# Altium PCB PCB1.PcbDoc
Units mm, origin at the board's own origin, x right, y up, seen from the top; angles counter-clockwise.
Board outline 71.98 x 71.98 mm, 2 copper layers (Top Layer, Bottom Layer); 36 components, 29 nets, 110 pads, 28 vias.
Unrouted connection lines stored in the file: 7.
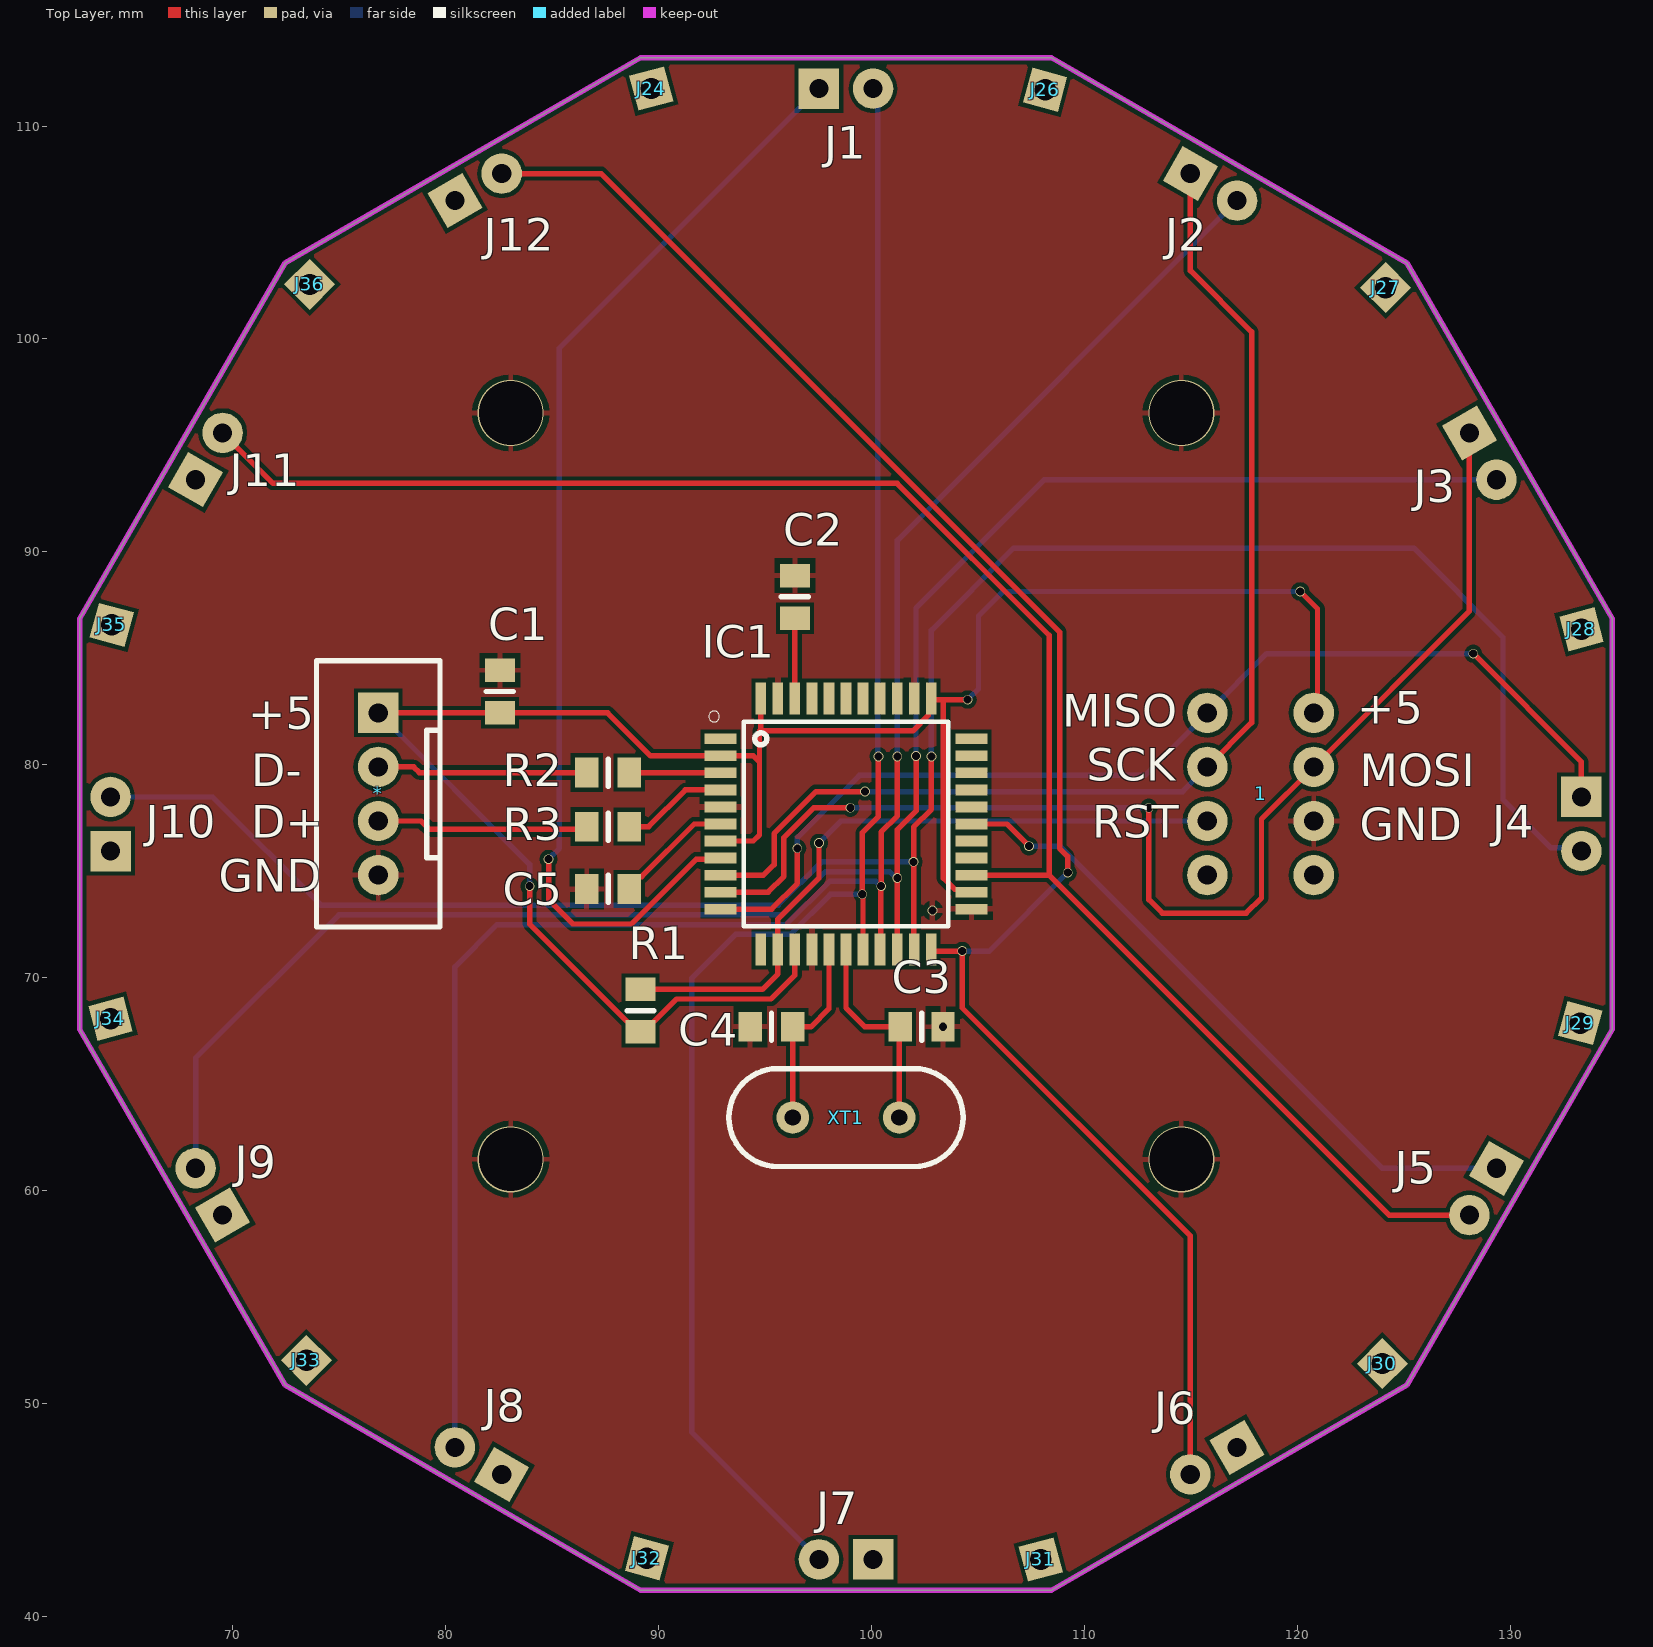
[diagram p0: Top Layer view]
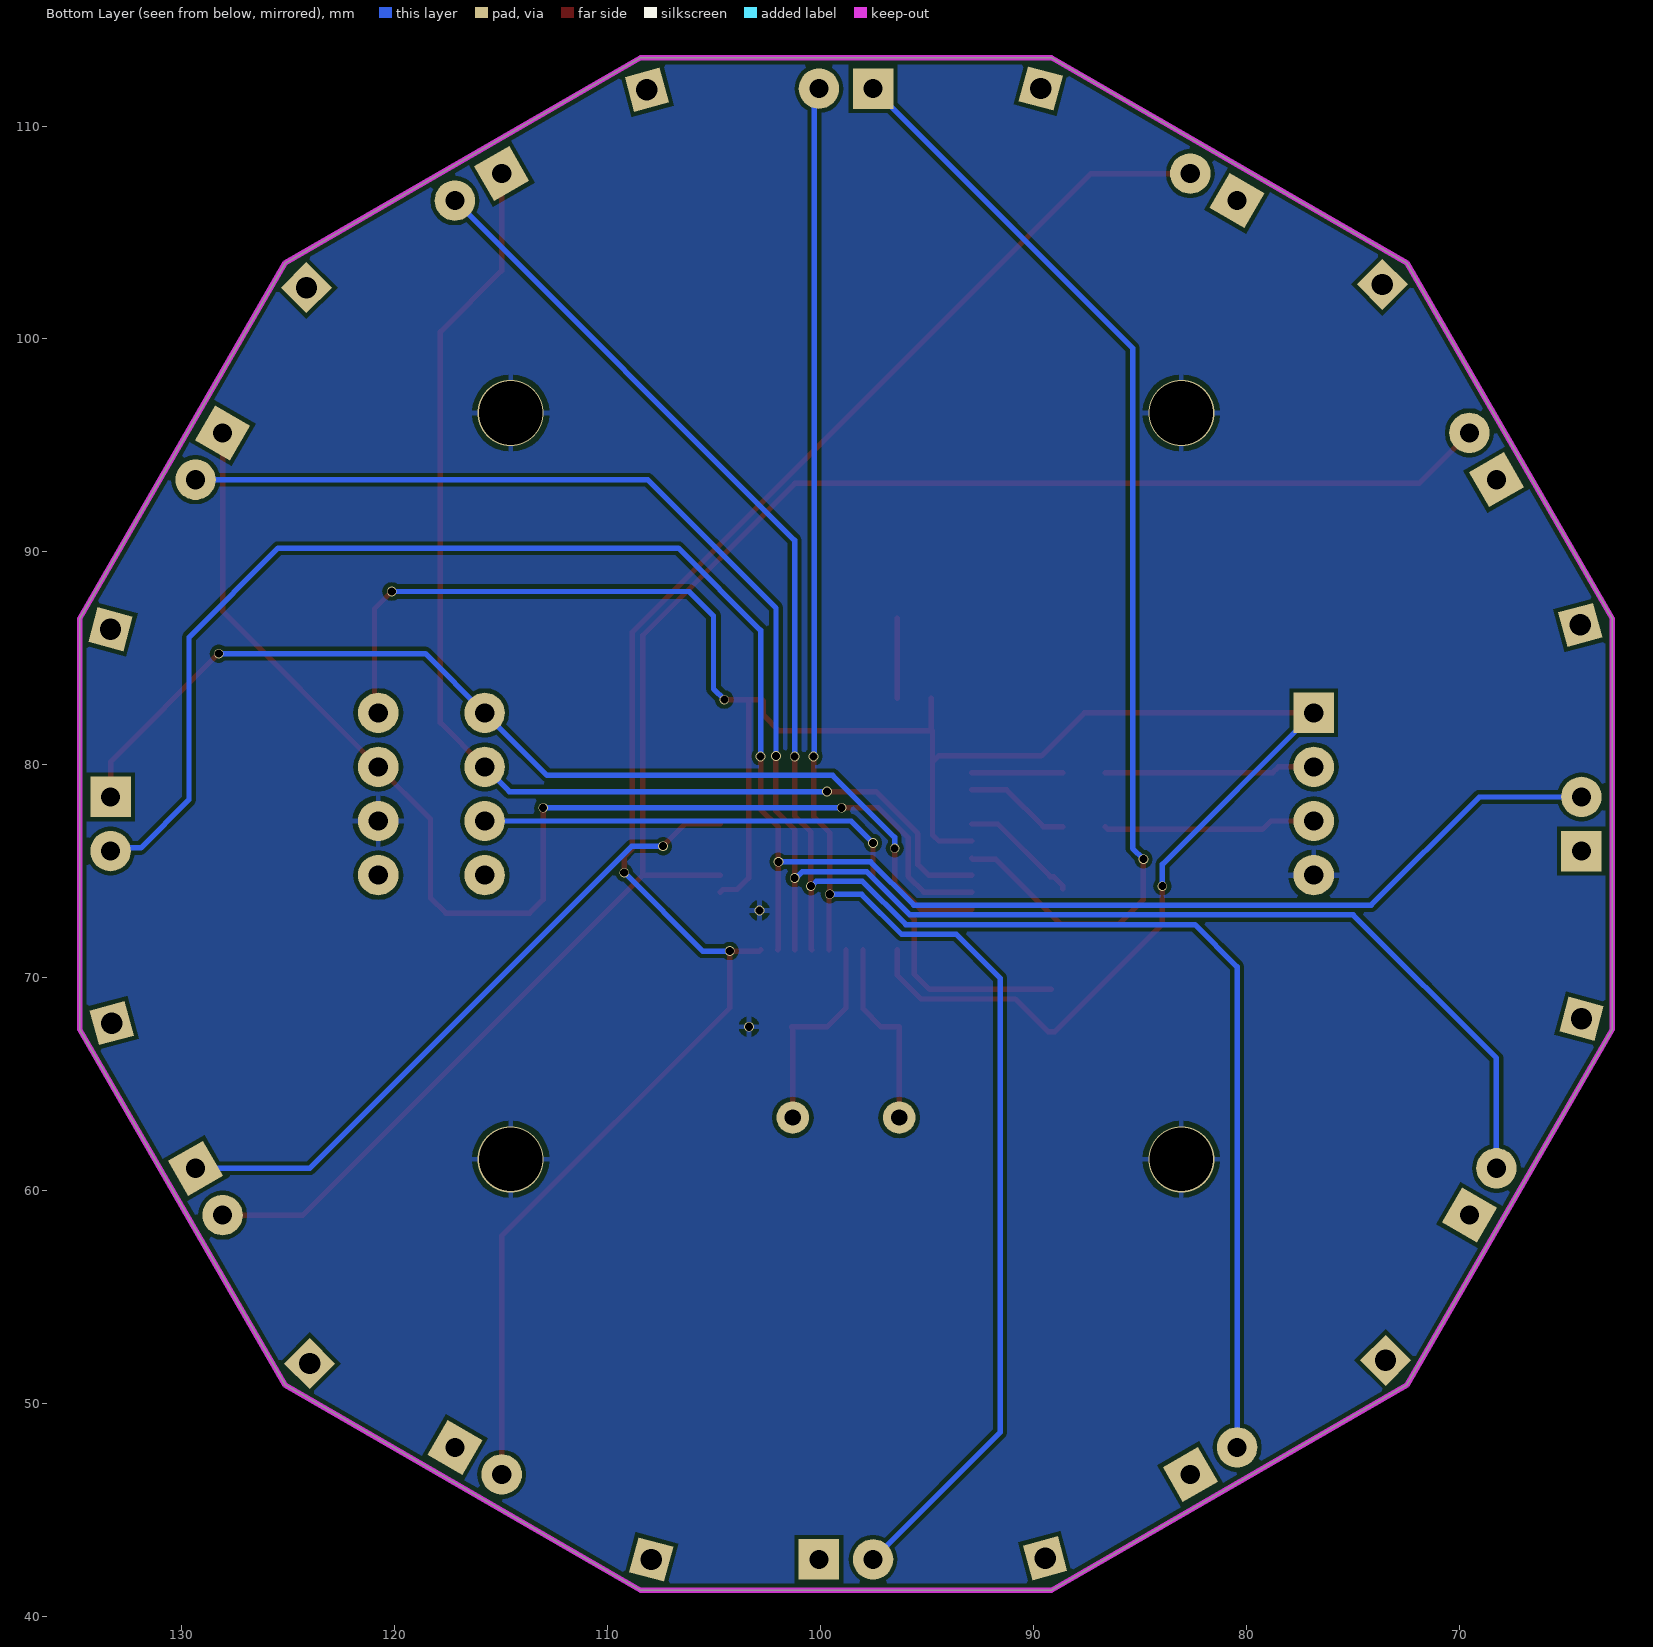
[diagram p1: Bottom Layer view, seen from below]

## Layer stack, top to bottom
Top Solder: solder mask 0.0102, Solder Resist, Dk 3.5
Top Layer: signal copper 0.0356
Dielectric 1: dielectric 0.32, FR-4, Dk 4.8
Bottom Layer: signal copper 0.0356
Bottom Solder: solder mask 0.0102, Solder Resist, Dk 3.5

## Board outline
72.46,50.87 62.817,67.573 62.817,86.859 72.46,103.562 89.163,113.205 108.449,113.205 125.152,103.562 134.795,86.859 134.795,67.573 125.152,50.87 108.449,41.227 89.163,41.227

## Design rules (kind name [scope] priority, off if disabled: settings)
Clearance [All] p1: gap=0.203 ignorepadtopadclearanceinfootprint=FALSE
PolygonConnect [All] p1: connectstyle=Relief reliefconductorwidth=0.254 reliefentries=4 polygonreliefangle="90 Angle" airgapwidth=0.254
RoutingVias [All] p1: holewidth=0.381 width=0.457 viastyle="Through Hole" minholewidth=0.381 minwidth=0.457 maxholewidth=0.711 maxwidth=1.27
SolderMaskExpansion [All] p1: expansion=0.102 istentingtop=FALSE
Width [All] p1: maxlimit=0.254 minlimit=0.254 preferedwidth=0.254
30 further rules are at their usual default settings.

## Classes and differential pairs
component class base: 1 * C1 C2 C3 C4 C5 IC1 J1 J2 J3 J4 J5 J6 J7 J8 J9 J10 J11 J12 J24 R1 R2 R3 XT1

## Components (designator, comment, footprint, x,y, rotation, side; value= is the part's Value field where it differs from the comment)
1 "2x4pin" 4pin_slot 115.777,82.436 r270 top
* "4Pin" XH2.54-4pin 76.835,78.626 r270 top
C1 "1uF" C0805 82.55,83.439 r270 top
C2 "0.1uF" C0805 96.406,87.884 r90 top
C3 "22pF" C0805 102.362,67.691 r180 top
C4 "22pF" C0805 95.306,67.691 r0 top
C5 "1uF" C0805 87.63,74.168 r180 top
IC1 "ATmega32U4" TQFP-44 98.806,77.216 r0 top
J1 "2Pin" TH2.54-2pin 98.806,111.76 r0 top
J2 "2Pin" TH2.54-2pin 116.078,107.132 r330 top
J3 "2Pin" TH2.54-2pin 128.722,94.488 r300 top
J4 "2Pin" TH2.54-2pin 133.35,77.216 r270 top
J5 "2Pin" TH2.54-2pin 128.722,59.944 r240 top
J6 "2Pin" TH2.54-2pin 116.078,47.3 r210 top
J7 "2Pin" TH2.54-2pin 98.806,42.672 r180 top
J8 "2Pin" TH2.54-2pin 81.534,47.3 r150 top
J9 "2Pin" TH2.54-2pin 68.89,59.944 r120 top
J10 "2Pin" TH2.54-2pin 64.262,77.216 r90 top
J11 "2Pin" TH2.54-2pin 68.89,94.488 r60 top
J12 "2Pin" TH2.54-2pin 81.534,107.132 r30 top
J24 "1Pin" 1Pin 89.662,111.76 r90 top
J26 "1Pin" 1Pin 108.159,111.704 r60 top
J27 "1Pin" 1Pin 124.15,102.407 r30 top
J28 "1Pin" 1Pin 133.35,86.36 r0 top
J29 "1Pin" 1Pin 133.294,67.863 r330 top
J30 "1Pin" 1Pin 123.997,51.872 r300 top
J31 "1Pin" 1Pin 107.95,42.672 r270 top
J32 "1Pin" 1Pin 89.453,42.728 r240 top
J33 "1Pin" 1Pin 73.462,52.025 r210 top
J34 "1Pin" 1Pin 64.262,68.072 r180 top
J35 "1Pin" 1Pin 64.318,86.569 r150 top
J36 "1Pin" 1Pin 73.615,102.56 r120 top
R1 "10K" R0805 89.154,68.453 r270 top
R2 "22" R0805 87.63,79.629 r180 top
R3 "22" R0805 87.63,77.089 r180 top
XT1 "Resonator" Resonator 98.806,63.429 r0 top

## Footprints (in the part's own frame and the unit in brackets; to place one, negate y for a bottom-side part, rotate by r counter-clockwise, add the part's x,y. Pads: shape width x height; smd on the part's side, far side on the other; paste and mask are expansions set on the pad)
1Pin [mm]
  rect 1.7x1.7 hole 1 rot 105: 1(0,0)
4pin_slot [mm]
  round 1.9 hole 0.9: 1(0,0) 2(0,5) 3(2.54,0) 4(2.54,5) 5(5.08,0) 6(5.08,5) 7(7.62,0) 8(7.62,5)
  body extent -4.57,-2.11 12.19,7.19, height 14
C0805 [mm]
  rect 1.1x1.4 smd: 1(-1,0) 2(1,0)
  silkscreen extent 0,-0.64 0,0.64, body extent -1,-0.62 1,0.63, height 0.6
R0805 [mm]
  rect 1.1x1.4 smd: 1(-1,0) 2(1,0)
  silkscreen extent 0,-0.64 0,0.64, body extent -1.15,-0.67 1.15,0.68, height 0.76
Resonator [mil]
  round 60 hole 30: 1(98.43,0) 2(-98.43,0)
  silkscreen extent -217,-91 217,91
TH2.54-2pin [mm]
  rect 1.9x1.9 hole 0.9: 1(-1.27,0)
  round 1.9 hole 0.9: 2(1.27,0)
TQFP-44 [mm]
  rect 1.5x0.5 smd: 1(-5.9,4) 2(-5.9,3.2) 3(-5.9,2.4) 4(-5.9,1.6) 5(-5.9,0.8) 6(-5.9,0) 7(-5.9,-0.8) 8(-5.9,-1.6) 9(-5.9,-2.4) 10(-5.9,-3.2) 11(-5.9,-4) 23(5.9,-4) 24(5.9,-3.2) 25(5.9,-2.4) 26(5.9,-1.6) 27(5.9,-0.8) 28(5.9,0) 29(5.9,0.8) 30(5.9,1.6) 31(5.9,2.4) 32(5.9,3.2) 33(5.9,4)
  rect 0.5x1.5 smd: 12(-4,-5.9) 13(-3.2,-5.9) 14(-2.4,-5.9) 15(-1.6,-5.9) 16(-0.8,-5.9) 17(0,-5.9) 18(0.8,-5.9) 19(1.6,-5.9) 20(2.4,-5.9) 21(3.2,-5.9) 22(4,-5.9) 34(4,5.9) 35(3.2,5.9) 36(2.4,5.9) 37(1.6,5.9) 38(0.8,5.9) 39(0,5.9) 40(-0.8,5.9) 41(-1.6,5.9) 42(-2.4,5.9) 43(-3.2,5.9) 44(-4,5.9)
  silkscreen extent -6.45,-4.8 4.8,5.3
XH2.54-4pin [mm]
  rect 1.9x1.9 hole 0.9: 1(-3.81,0)
  round 1.9 hole 0.9: 2(-1.27,0) 3(1.27,0) 4(3.81,0)
  silkscreen extent -6.25,-2.9 6.25,2.9, body extent -6.25,-2.9 6.25,2.9, height 7

## Part data
C1 C2 C3 C4 C5: library part Cap
R1 R2 R3: library part Resistor

## Via types
v1: diameter 0.457, hole 0.381, Top Layer to Bottom Layer, tented both sides, 22 vias
v2: diameter 3.1, hole 3, Top Layer to Bottom Layer, tented both sides, 5 vias
v3: diameter 0.457, hole 0.381, Top Layer to Bottom Layer, 1 vias

## Nets (pads, with @x,y where several pads share a name; then routed paths per layer and width w, separated by ;. In a path a pad name is that pad's centre, name@x,y a point inside that pad or via, vN(x,y) a via of type N, cw(c..) or ccw(c..) an arc to the next point about the centre after c; other vN are vias at no path point)
+5: 1.2 *.1 C1.2 IC1.2 IC1.7 IC1.14 IC1.24 IC1.34 IC1.44 R1.2 | length 103.6
  Top Layer w0.254: *.1 82.166,82.436 82.169,82.439 C1.2 87.609,82.439 89.632,80.416 IC1.2 94.463,80.416 94.742,80.137 ; v1(83.947,74.295) 83.947,72.51 89.004,67.453 R1.2 89.304,67.453 90.847,68.996 95.285,68.996 96.406,70.117 IC1.14 ; IC1.7 94.45,76.416 94.742,76.708 94.742,80.137 ; 94.806,81.595 IC1.44 ; v1(104.521,83.058) 103.378,83.058 ; IC1.24 104.583,74.139 103.915,74.139 103.378,74.676 103.378,83.058 ; v1(120.142,88.138) 120.954,87.326 120.954,82.613 1.2 ; 94.742,80.137 94.742,81.595 101.951,81.595 102.683,82.326 102.683,82.993 IC1.34 102.864,83.058 103.378,83.058
  Bottom Layer w0.254: *.1 83.947,75.324 v1(83.947,74.295) ; v1(104.521,83.058) 105.029,83.566 105.029,86.995 106.172,88.138 v1(120.142,88.138)
COL0: IC1.18 J1.2 J7.2 | length 80.3
  Top Layer w0.254: IC1.18 99.606,73.876 v1(99.568,73.914) 99.568,76.799 100.33,77.561 v1(100.33,80.391)
  Bottom Layer w0.254: J7.2 91.567,48.641 91.567,69.977 93.624,72.034 96.188,72.034 98.067,73.914 v1(99.568,73.914) ; J1.2 100.291,111.545 100.291,80.43 v1(100.33,80.391)
COL1: IC1.19 J2.2 J8.2 | length 86.5
  Top Layer w0.254: IC1.19 100.431,71.341 100.431,74.269 v1(100.457,74.295) 100.457,76.835 101.219,77.597 v1(101.219,80.391)
  Bottom Layer w0.254: J8.2 80.434,70.503 82.423,72.492 95.998,72.492 98.03,74.524 100.203,74.524 100.432,74.295 v1(100.457,74.295) ; v1(101.219,80.391) 101.219,90.538 J2.2
COL2: IC1.20 J3.2 J9.2 | length 88.1
  Top Layer w0.254: IC1.20 101.213,71.322 101.213,74.67 v1(101.219,74.676) 101.219,76.95 102.108,77.839 102.108,80.391 v1(102.094,80.405)
  Bottom Layer w0.254: J9.2 68.255,66.22 74.983,72.949 95.809,72.949 97.841,74.981 100.859,74.981 101.164,74.676 v1(101.219,74.676) ; v1(102.094,80.405) 102.094,87.362 108.12,93.388 J3.2
COL3: IC1.21 J4.2 J10.2 | length 98.5
  Top Layer w0.254: IC1.21 101.993,71.329 101.993,75.426 v1(101.981,75.438) 101.981,77.066 102.819,77.904 v1(102.819,80.391)
  Bottom Layer w0.254: J10.2 69.057,78.486 74.137,73.406 95.619,73.406 97.651,75.438 v1(101.981,75.438) ; v1(102.819,80.391) 102.819,86.309 106.68,90.17 125.476,90.17 129.667,85.979 129.667,78.359 131.931,76.095 133.201,76.095 J4.2
COL4: IC1.25 J5.2 J11.2 | length 84
  Top Layer w0.254: J11.2 71.895,93.218 101.207,93.218 108.344,86.081 108.344,74.816 ; IC1.25 108.344,74.816 ; J5.2 124.316,58.844 108.344,74.816
COL5: IC1.22 J6.2 J12.2 | length 83.6
  Top Layer w0.254: J12.2 87.305,107.767 108.839,86.233 108.839,76.073 109.22,75.692 v1(109.22,74.93) ; IC1.22 102.875,71.247 v1(104.267,71.247) 104.267,68.58 114.978,57.869 J6.2
  Bottom Layer w0.254: v1(104.267,71.247) 105.537,71.247 v1(109.22,74.93)
D+: *.3 R3.2 | length 10
  Top Layer w0.254: *.3 78.854,77.356 79.248,76.962 86.503,76.962 R3.2
D-: *.2 R2.2 | length 9.9
  Top Layer w0.254: *.2 78.497,79.896 78.764,79.629 R2.2
GND: 1.6 *.4 C1.1 C2.2 C3.1 C4.1 C5.2 IC1.5 IC1.15 IC1.23 IC1.35 IC1.43
  other v1: 102.87,73.152
  other v2: 83.058,61.468 114.554,61.468 83.058,96.52 114.554,96.52 114.554,96.52
  other v3: 103.362,67.691
MISO: 1.1 IC1.11 J4.1 | length 50.4
  Top Layer w0.254: IC1.11 95.314,73.216 96.52,74.422 v1(96.52,76.073) ; v1(128.27,85.217) 133.35,80.137 J4.1
  Bottom Layer w0.254: v1(96.52,76.073) 96.52,76.593 99.429,79.502 112.843,79.502 1.1 118.558,85.217 v1(128.27,85.217)
MOSI: 1.4 IC1.10 J3.1 | length 58.9
  Top Layer w0.254: IC1.10 95.149,74.016 95.885,74.752 95.885,76.581 97.282,77.978 v1(99.009,77.978) ; v1(113.03,77.978) 113.03,73.66 113.665,73.025 117.602,73.025 118.323,73.746 118.323,77.442 1.4 128.077,87.196 128.077,93.918 128.087,93.929 J3.1
  Bottom Layer w0.254: v1(99.009,77.978) v1(113.03,77.978)
NetC2_1: C2.1 IC1.42 | length 3.8
  Top Layer w0.254: IC1.42 C2.1
NetC5_1: C5.1 IC1.6 | length 5.6
  Top Layer w0.254: C5.1 88.63,74.318 89.053,74.741 89.203,74.741 91.678,77.216 IC1.6
NetIC1_3: IC1.3 R2.1 | length 4.3
  Top Layer w0.254: R2.1 88.643,79.616 IC1.3
NetIC1_4: IC1.4 R3.1 | length 5
  Top Layer w0.254: R3.1 89.535,77.089 91.262,78.816 IC1.4
RESET: 1.5 IC1.13 R1.1 | length 32.4
  Top Layer w0.254: R1.1 94.884,69.453 95.606,70.175 IC1.13 95.606,72.746 97.536,74.676 v1(97.536,76.327)
  Bottom Layer w0.254: v1(97.536,76.327) 98.565,77.356 1.5
ROW0: IC1.8 J1.1 | length 53.2
  Top Layer w0.254: v1(84.836,75.565) 84.836,73.66 85.979,72.517 88.722,72.517 91.775,75.57 92.859,75.57 IC1.8
  Bottom Layer w0.254: v1(84.836,75.565) 85.344,76.073 85.344,99.568 J1.1
ROW1: 1.3 IC1.9 J2.1 | length 55.8
  Top Layer w0.254: IC1.9 94.933,74.816 95.428,75.311 95.428,76.77 97.397,78.74 v1(99.695,78.74) ; J2.1 114.978,103.208 117.856,100.33 117.856,81.975 1.3
  Bottom Layer w0.254: v1(99.695,78.74) 114.621,78.74 1.3
ROW4: IC1.28 J5.1 | length 31.3
  Top Layer w0.254: IC1.28 106.359,77.216 v1(107.401,76.174)
  Bottom Layer w0.254: v1(107.401,76.174) 108.865,76.174 123.995,61.044 J5.1
ROW5: IC1.29 J6.1
ROW6: IC1.30 J7.1
ROW7: IC1.12 J8.1
ROW8: IC1.41 J9.1
ROW9: IC1.40 J10.1
ROW10: IC1.39 J11.1
ROW11: IC1.38 J12.1
XT1: C3.2 IC1.17 XT1.1 | length 9.9
  Top Layer w0.254: IC1.17 98.806,68.58 99.695,67.691 C3.2 101.306,67.635 XT1.1
XT2: C4.2 IC1.16 XT1.2 | length 9.1
  Top Layer w0.254: XT1.2 C4.2 97.155,67.691 98.006,68.542 IC1.16
pads on no net: 1.7 1.8 IC1.1 IC1.26 IC1.27 IC1.31 IC1.32 IC1.33 IC1.36 IC1.37 J24.1 J26.1 J27.1 J28.1 J29.1 J30.1 J31.1 J32.1 J33.1 J34.1 J35.1 J36.1

## Polygon pours and split planes (outlines as drawn)
GND on Top Layer "Top Layer-No Net" (solid, pour order 0): 72.46,50.87 62.817,67.573 62.817,86.859 72.46,103.562 89.163,113.205 108.449,113.205 125.152,103.562 134.795,86.859 134.795,67.573 125.152,50.87 108.449,41.227 89.163,41.227
GND on Bottom Layer "Bottom Layer-GND" (solid, pour order 1): 72.46,50.87 62.817,67.573 62.817,86.859 72.46,103.562 89.163,113.205 108.449,113.205 125.152,103.562 134.795,86.859 134.795,67.573 125.152,50.87 108.449,41.227 89.163,41.227

## Keep-outs
Keep-Out Layer:
  the board outline again, w0.254

## Silkscreen, mask and mechanical layers (free items; w line width, h text height)
Top Overlay:
  text "+5" at 122.809,81.915 h1.52
  text "MISO" at 108.966,81.788 h1.52
  text "+5" at 70.739,81.661 h1.52
  text "SCK" at 110.109,79.248 h1.52
  text "D-" at 70.866,78.994 h1.52
  text "MOSI" at 122.936,78.994 h1.52
  text "D+" at 70.866,76.581 h1.52
  text "RST" at 110.363,76.581 h1.52
  text "GND" at 122.936,76.454 h1.52
  text "GND" at 69.342,74.041 h1.52

## Dimensions
89.163,113.205 to 83.058,96.52 on Top Overlay
83.058,61.468 to 89.163,41.227 on Top Overlay
89.163,113.205 to 89.163,41.227 on Top Overlay
83.058,96.52 to 62.817,86.859 on Top Overlay
134.795,67.573 to 62.817,67.573 on Top Overlay
83.058,96.52 to 83.058,61.468 on Top Overlay
83.058,96.52 to 114.554,96.52 on Top Overlay